# Altium PCB WorldClock.PcbDoc (part 8 of 13)
Units mil, origin at the board's own origin, x right, y up, seen from the top; angles counter-clockwise.
Board outline 3700 x 3850 mil, 2 copper layers (Top Layer, Bottom Layer); 227 components, 134 nets, 1324 pads, 248 vias.
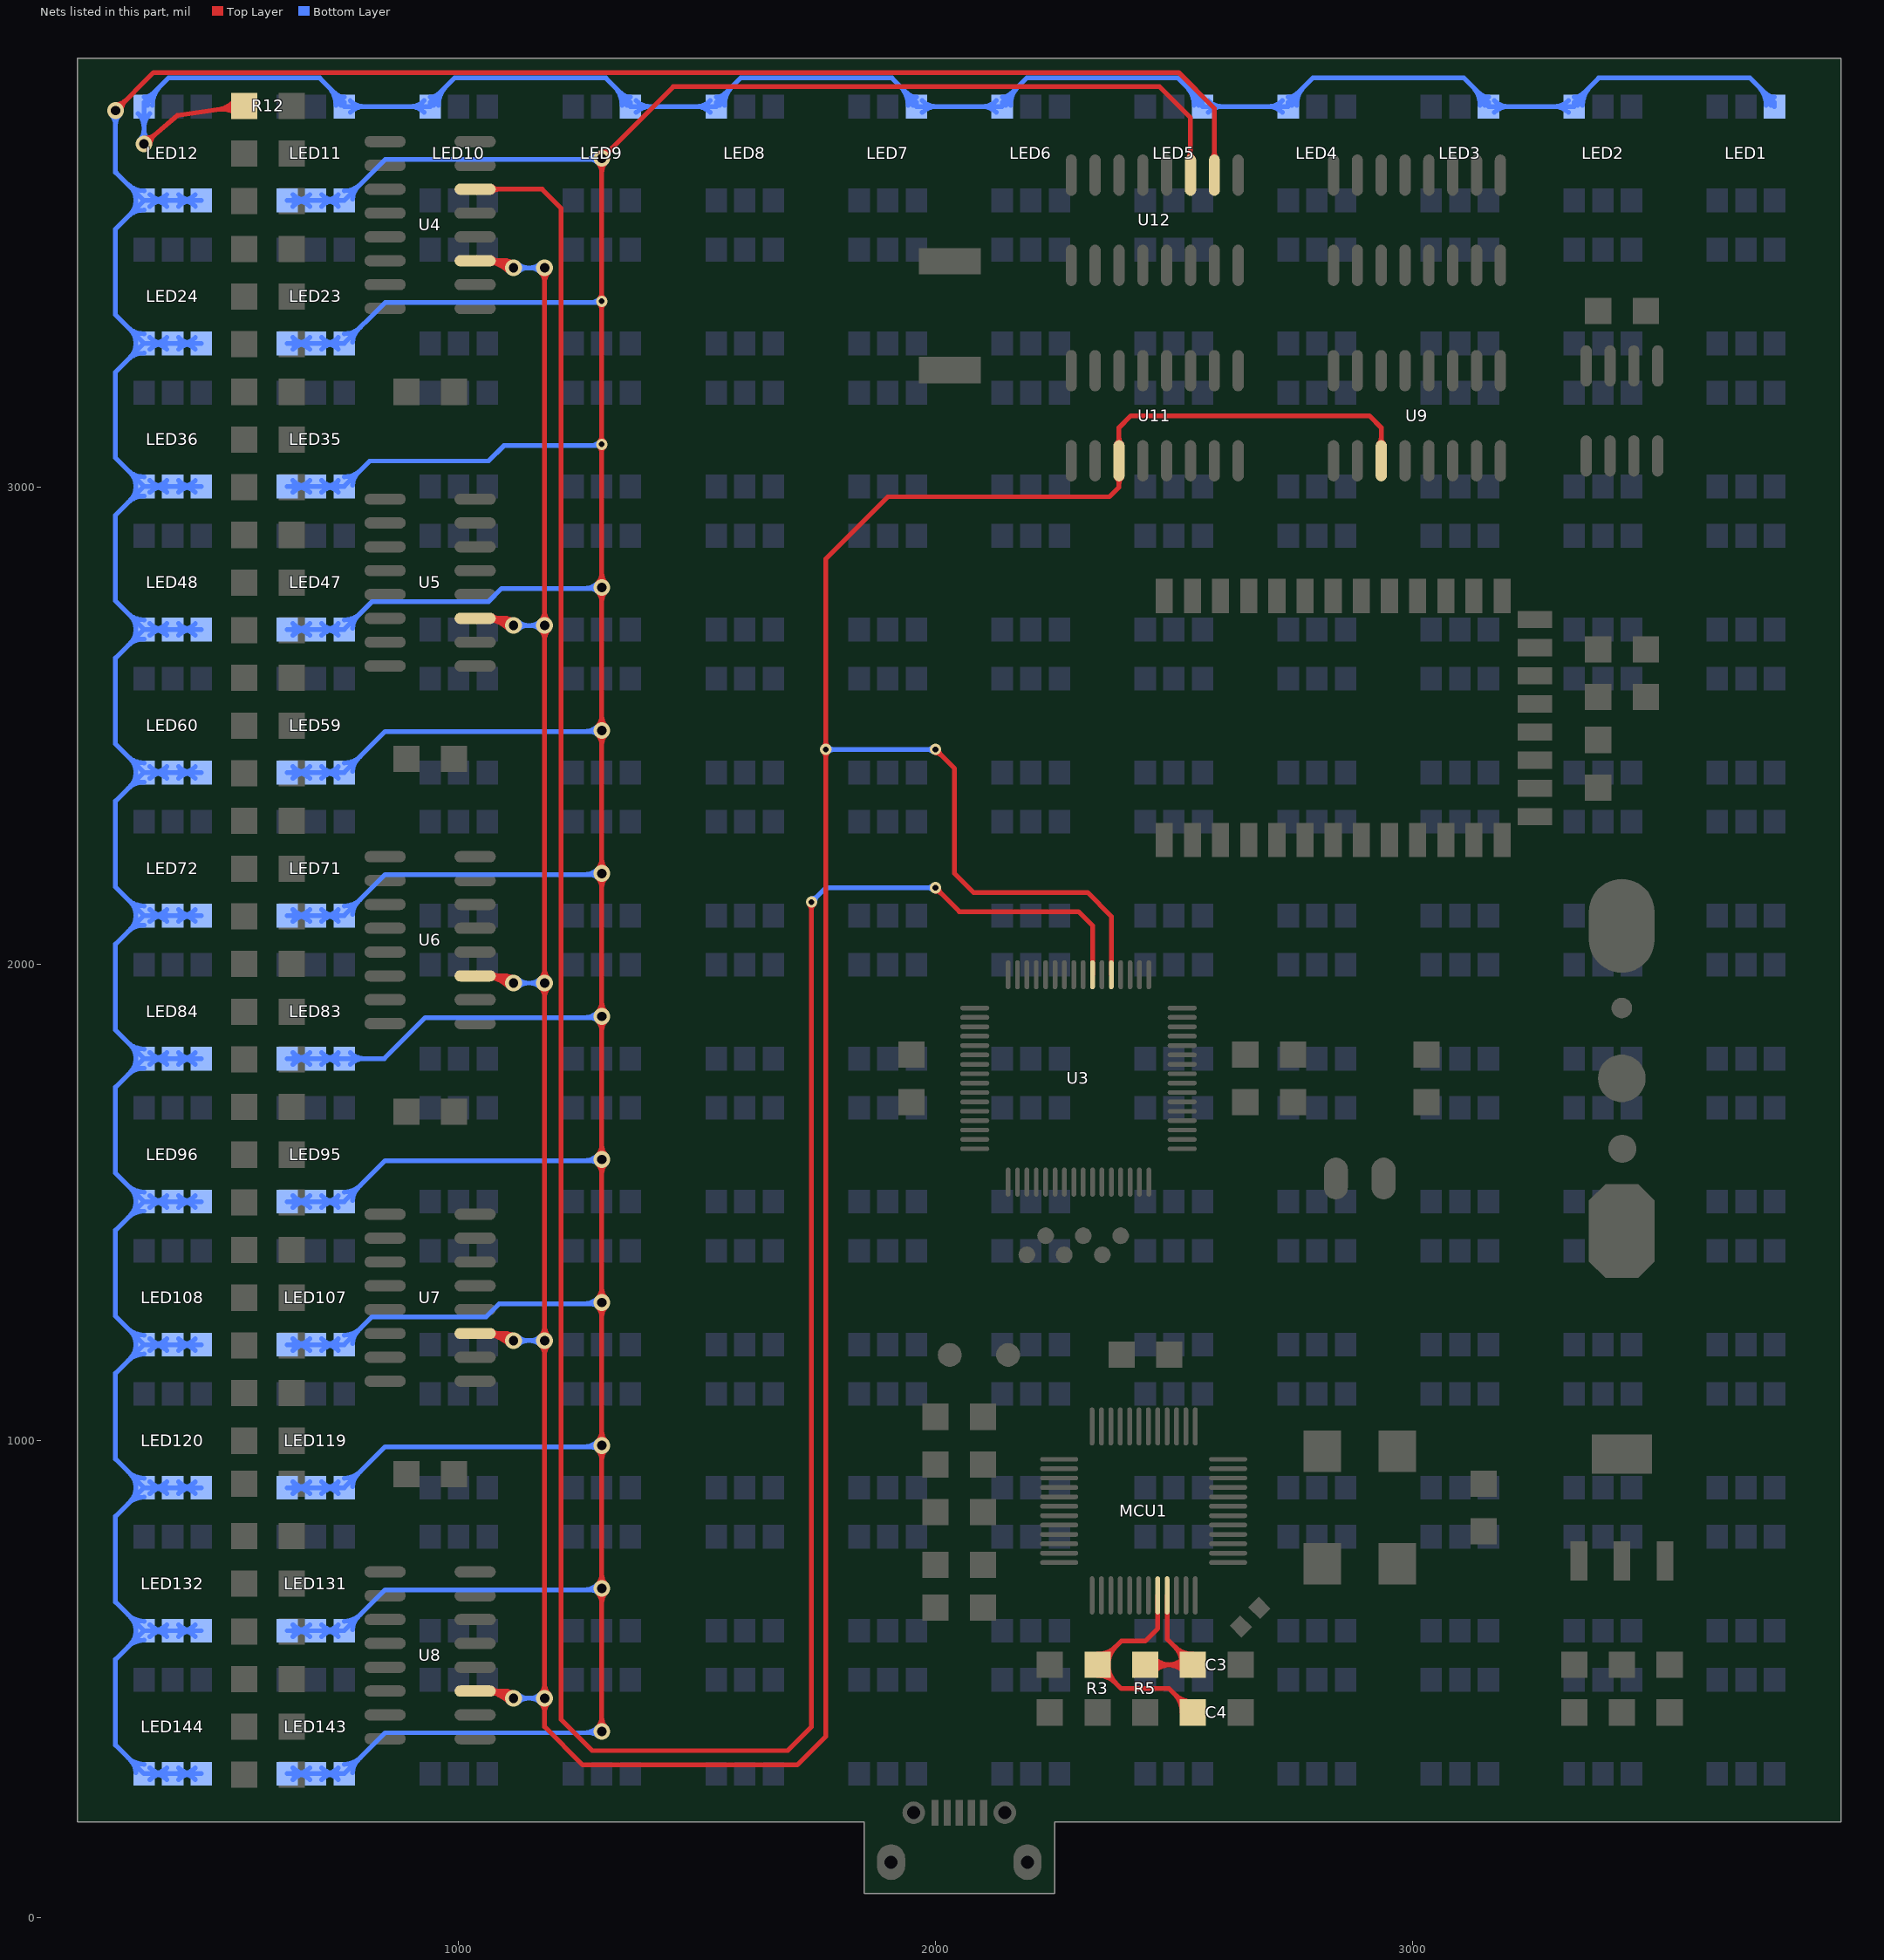
[diagram p8: the nets of this part, all layers, seen from the top]

## Via types
v1: diameter 35, hole 20, Top Layer to Bottom Layer, tented both sides, 213 vias
v2: diameter 24, hole 12, Top Layer to Bottom Layer, tented both sides, 35 vias

## Nets (pads, with @x,y where several pads share a name; then routed paths per layer and width w, separated by ;. In a path a pad name is that pad's centre, name@x,y a point inside that pad or via, vN(x,y) a via of type N, cw(c..) or ccw(c..) an arc to the next point about the centre after c; other vN are vias at no path point) (continued)
CH11: LED11.4 LED11.5 LED11.6 LED23.4 LED23.5 LED23.6 LED35.4 LED35.5 LED35.6 LED47.4 LED47.5 LED47.6 LED59.4 LED59.5 LED59.6 LED71.4 LED71.5 LED71.6 LED83.4 LED83.5 LED83.6 LED95.4 LED95.5 LED95.6 LED107.4 LED107.5 LED107.6 LED119.4 LED119.5 LED119.6 LED131.4 LED131.5 LED131.6 LED143.4 LED143.5 LED143.6 U12.11 | length 19957.2
  Top Layer w10: v1@1291.16,398.84 ccw(c1269.82,420.18) 1300,420.18 ccw(c1330.18,420.18) v1@1308.84,398.84 ; v1@1291.16,681.16 cw(c1269.82,659.82) 1300,659.82 cw(c1330.18,659.82) v1@1308.84,681.16 ; v1@1291.16,698.84 ccw(c1269.82,720.18) 1300,720.18 ccw(c1330.18,720.18) v1@1308.84,698.84 ; v1@1291.16,981.16 cw(c1269.82,959.82) 1300,959.82 cw(c1330.18,959.82) v1@1308.84,981.16 ; v1@1291.16,998.84 ccw(c1269.82,1020.18) 1300,1020.18 ccw(c1330.18,1020.18) v1@1308.84,998.84 ; v1@1291.16,1281.16 cw(c1269.82,1259.82) 1300,1259.82 cw(c1330.18,1259.82) v1@1308.84,1281.16 ; v1@1291.16,1298.84 ccw(c1269.82,1320.18) 1300,1320.18 ccw(c1330.18,1320.18) v1@1308.84,1298.84 ; v1@1291.16,1581.16 cw(c1269.82,1559.82) 1300,1559.82 cw(c1330.18,1559.82) v1@1308.84,1581.16 ; v1@1291.16,1598.84 ccw(c1269.82,1620.18) 1300,1620.18 ccw(c1330.18,1620.18) v1@1308.84,1598.84 ; v1@1291.16,1881.16 cw(c1269.82,1859.82) 1300,1859.82 cw(c1330.18,1859.82) v1@1308.84,1881.16 ; v1@1291.16,1898.84 ccw(c1269.82,1920.18) 1300,1920.18 ccw(c1330.18,1920.18) v1@1308.84,1898.84 ; v1@1291.16,2181.16 cw(c1269.82,2159.82) 1300,2159.82 cw(c1330.18,2159.82) v1@1308.84,2181.16 ; v1@1291.16,2198.84 ccw(c1269.82,2220.18) 1300,2220.18 ccw(c1330.18,2220.18) v1@1308.84,2198.84 ; v1@1291.16,2481.16 cw(c1269.82,2459.82) 1300,2459.82 cw(c1330.18,2459.82) v1@1308.84,2481.16 ; v1@1291.16,2498.84 ccw(c1269.82,2520.18) 1300,2520.18 ccw(c1330.18,2520.18) v1@1308.84,2498.84 ; v1@1291.16,2781.16 cw(c1269.82,2759.82) 1300,2759.82 cw(c1330.18,2759.82) v1@1308.84,2781.16 ; v1@1291.16,2798.84 ccw(c1269.82,2820.18) 1300,2820.18 ccw(c1330.18,2820.18) v1@1308.84,2798.84 ; v1@1291.16,3681.16 cw(c1269.82,3659.82) 1300,3659.82 cw(c1330.18,3659.82) v1@1308.84,3681.16 ; v2@1295.05,3085.05 cw(c1283.1,3073.1) 1300,3073.1 cw(c1316.9,3073.1) v2@1304.95,3085.05 ; v2@1295.05,3094.95 ccw(c1283.1,3106.9) 1300,3106.9 ccw(c1316.9,3106.9) v2@1304.95,3094.95 ; v2@1295.05,3385.05 cw(c1283.1,3373.1) 1300,3373.1 cw(c1316.9,3373.1) v2@1304.95,3385.05 ; v2@1295.05,3394.95 ccw(c1283.1,3406.9) 1300,3406.9 ccw(c1316.9,3406.9) v2@1304.95,3394.95 ; v1(1300,390) v1(1300,690) v1(1300,990) v1(1300,1290) v1(1300,1590) v1(1300,1890) v1(1300,2190) v1(1300,2490) v1(1300,2790) v2(1300,3090) v2(1300,3390) v1(1300,3690) 1450,3840 2470,3840 2535,3775 U12.11@2535,3654.49 ; v1@1300,3702.5 ccw(c1300,3732.68) 1321.34,3711.34 ccw(c1342.68,3690) v1@1312.5,3690 ; U12.11@2530.18,3690.8 ccw(c2518.56,3702.43) 2535,3702.43 ccw(c2551.44,3702.43) U12.11@2539.82,3690.8
  Bottom Layer w10: LED143.6@640,301.57 LED143.5@700,301.57 LED143.4@760,301.57 845.93,387.5 1297.5,387.5 v1(1300,390) ; LED131.6@640,601.57 LED131.5@700,601.57 LED131.4@760,601.57 845.93,687.5 1297.5,687.5 v1(1300,690) ; LED119.6@640,901.57 LED119.5@700,901.57 LED119.4@760,901.57 845.93,987.5 1297.5,987.5 v1(1300,990) ; LED107.6@640,1201.57 LED107.5@700,1201.57 LED107.4@760,1201.57 818.43,1260 1057.5,1260 1085,1287.5 1297.5,1287.5 v1(1300,1290) ; LED95.6@640,1501.57 LED95.5@700,1501.57 LED95.4@760,1501.57 845.93,1587.5 1297.5,1587.5 v1(1300,1590) ; LED83.6@640,1801.57 LED83.5@700,1801.57 LED83.4@760,1801.57 844.07,1801.57 930,1887.5 1297.5,1887.5 v1(1300,1890) ; LED71.6@640,2101.57 LED71.5@700,2101.57 LED71.4@760,2101.57 845.93,2187.5 1297.5,2187.5 v1(1300,2190) ; LED59.6@640,2401.57 LED59.5@700,2401.57 LED59.4@760,2401.57 845.93,2487.5 1297.5,2487.5 v1(1300,2490) ; LED47.6@640,2701.57 LED47.5@700,2701.57 LED47.4@760,2701.57 818.43,2760 1062.5,2760 1090,2787.5 1297.5,2787.5 v1(1300,2790) ; LED35.6@640,3001.57 LED35.5@700,3001.57 LED35.4@760,3001.57 813.43,3055 1062.5,3055 1095,3087.5 1297.5,3087.5 v2(1300,3090) ; LED23.6@640,3301.57 LED23.5@700,3301.57 LED23.4@760,3301.57 845.93,3387.5 1297.5,3387.5 v2(1300,3390) ; LED11.6@640,3601.57 LED11.5@700,3601.57 LED11.4@760,3601.57 845.93,3687.5 1297.5,3687.5 v1(1300,3690) ; LED143.6@652.37,289.2 cw(c682.25,259.33) 682.25,301.57 cw(c682.25,343.82) LED143.6@652.37,313.95 ; LED131.6@652.37,589.2 cw(c682.25,559.33) 682.25,601.57 cw(c682.25,643.82) LED131.6@652.37,613.95 ; LED119.6@652.37,889.2 cw(c682.25,859.33) 682.25,901.57 cw(c682.25,943.82) LED119.6@652.37,913.95 ; LED107.6@652.37,1189.2 cw(c682.25,1159.33) 682.25,1201.57 cw(c682.25,1243.82) LED107.6@652.37,1213.95 ; LED95.6@652.37,1489.2 cw(c682.25,1459.33) 682.25,1501.57 cw(c682.25,1543.82) LED95.6@652.37,1513.95 ; LED83.6@652.37,1789.2 cw(c682.25,1759.33) 682.25,1801.57 cw(c682.25,1843.82) LED83.6@652.37,1813.95 ; LED71.6@652.37,2089.2 cw(c682.25,2059.33) 682.25,2101.57 cw(c682.25,2143.82) LED71.6@652.37,2113.95 ; LED59.6@652.37,2389.2 cw(c682.25,2359.33) 682.25,2401.57 cw(c682.25,2443.82) LED59.6@652.37,2413.95 ; LED47.6@652.37,2689.2 cw(c682.25,2659.33) 682.25,2701.57 cw(c682.25,2743.82) LED47.6@652.37,2713.95 ; LED35.6@652.37,2989.2 cw(c682.25,2959.33) 682.25,3001.57 cw(c682.25,3043.82) LED35.6@652.37,3013.95 ; LED23.6@652.37,3289.2 cw(c682.25,3259.33) 682.25,3301.57 cw(c682.25,3343.82) LED23.6@652.37,3313.95 ; LED11.6@652.37,3589.2 cw(c682.25,3559.33) 682.25,3601.57 cw(c682.25,3643.82) LED11.6@652.37,3613.95 ; LED143.6@655.16,295.32 cw(c671.02,286.17) 666.28,303.86 ; LED143.6@655.16,307.82 ccw(c671.02,316.98) 666.28,299.29 ; LED131.6@655.16,595.32 cw(c671.02,586.17) 666.28,603.86 ; LED131.6@655.16,607.82 ccw(c671.02,616.98) 666.28,599.29 ; LED119.6@655.16,895.32 cw(c671.02,886.17) 666.28,903.86 ; LED119.6@655.16,907.82 ccw(c671.02,916.98) 666.28,899.29 ; LED107.6@655.16,1195.32 cw(c671.02,1186.17) 666.28,1203.86 ; LED107.6@655.16,1207.82 ccw(c671.02,1216.98) 666.28,1199.29 ; LED95.6@655.16,1495.32 cw(c671.02,1486.17) 666.28,1503.86 ; LED95.6@655.16,1507.82 ccw(c671.02,1516.98) 666.28,1499.29 ; LED83.6@655.16,1795.32 cw(c671.02,1786.17) 666.28,1803.86 ; LED83.6@655.16,1807.82 ccw(c671.02,1816.98) 666.28,1799.29 ; LED71.6@655.16,2095.32 cw(c671.02,2086.17) 666.28,2103.86 ; LED71.6@655.16,2107.82 ccw(c671.02,2116.98) 666.28,2099.29 ; LED59.6@655.16,2395.32 cw(c671.02,2386.17) 666.28,2403.86 ; LED59.6@655.16,2407.82 ccw(c671.02,2416.98) 666.28,2399.29 ; LED47.6@655.16,2695.32 cw(c671.02,2686.17) 666.28,2703.86 ; LED47.6@655.16,2707.82 ccw(c671.02,2716.98) 666.28,2699.29 ; LED35.6@655.16,2995.32 cw(c671.02,2986.17) 666.28,3003.86 ; LED35.6@655.16,3007.82 ccw(c671.02,3016.98) 666.28,2999.29 ; LED23.6@655.16,3295.32 cw(c671.02,3286.17) 666.28,3303.86 ; LED23.6@655.16,3307.82 ccw(c671.02,3316.98) 666.28,3299.29 ; LED11.6@655.16,3595.32 cw(c671.02,3586.17) 666.28,3603.86 ; LED11.6@655.16,3607.82 ccw(c671.02,3616.98) 666.28,3599.29 ; LED143.6@656.56,293.41 cw(c664.87,290.57) 667.15,299.06 ; LED143.6@656.56,309.74 ccw(c664.87,312.58) 667.15,304.09 ; LED131.6@656.56,593.41 cw(c664.87,590.57) 667.15,599.06 ; LED131.6@656.56,609.74 ccw(c664.87,612.58) 667.15,604.09 ; LED119.6@656.56,893.41 cw(c664.87,890.57) 667.15,899.06 ; LED119.6@656.56,909.74 ccw(c664.87,912.58) 667.15,904.09 ; LED107.6@656.56,1193.41 cw(c664.87,1190.57) 667.15,1199.06 ; LED107.6@656.56,1209.74 ccw(c664.87,1212.58) 667.15,1204.09 ; LED95.6@656.56,1493.41 cw(c664.87,1490.57) 667.15,1499.06 ; LED95.6@656.56,1509.74 ccw(c664.87,1512.58) 667.15,1504.09 ; LED83.6@656.56,1793.41 cw(c664.87,1790.57) 667.15,1799.06 ; LED83.6@656.56,1809.74 ccw(c664.87,1812.58) 667.15,1804.09 ; LED71.6@656.56,2093.41 cw(c664.87,2090.57) 667.15,2099.06 ; LED71.6@656.56,2109.74 ccw(c664.87,2112.58) 667.15,2104.09 ; LED59.6@656.56,2393.41 cw(c664.87,2390.57) 667.15,2399.06 ; LED59.6@656.56,2409.74 ccw(c664.87,2412.58) 667.15,2404.09 ; LED47.6@656.56,2693.41 cw(c664.87,2690.57) 667.15,2699.06 ; LED47.6@656.56,2709.74 ccw(c664.87,2712.58) 667.15,2704.09 ; LED35.6@656.56,2993.41 cw(c664.87,2990.57) 667.15,2999.06 ; LED35.6@656.56,3009.74 ccw(c664.87,3012.58) 667.15,3004.09 ; LED23.6@656.56,3293.41 cw(c664.87,3290.57) 667.15,3299.06 ; LED23.6@656.56,3309.74 ccw(c664.87,3312.58) 667.15,3304.09 ; LED11.6@656.56,3593.41 cw(c664.87,3590.57) 667.15,3599.06 ; LED11.6@656.56,3609.74 ccw(c664.87,3612.58) 667.15,3604.09 ; LED143.5@687.63,289.2 ccw(c657.75,259.33) 657.75,301.57 ccw(c657.75,343.82) LED143.5@687.63,313.95 ; LED131.5@687.63,589.2 ccw(c657.75,559.33) 657.75,601.57 ccw(c657.75,643.82) LED131.5@687.63,613.95 ; LED119.5@687.63,889.2 ccw(c657.75,859.33) 657.75,901.57 ccw(c657.75,943.82) LED119.5@687.63,913.95 ; LED107.5@687.63,1189.2 ccw(c657.75,1159.33) 657.75,1201.57 ccw(c657.75,1243.82) LED107.5@687.63,1213.95 ; LED95.5@687.63,1489.2 ccw(c657.75,1459.33) 657.75,1501.57 ccw(c657.75,1543.82) LED95.5@687.63,1513.95 ; LED83.5@687.63,1789.2 ccw(c657.75,1759.33) 657.75,1801.57 ccw(c657.75,1843.82) LED83.5@687.63,1813.95 ; LED71.5@687.63,2089.2 ccw(c657.75,2059.33) 657.75,2101.57 ccw(c657.75,2143.82) LED71.5@687.63,2113.95 ; LED59.5@687.63,2389.2 ccw(c657.75,2359.33) 657.75,2401.57 ccw(c657.75,2443.82) LED59.5@687.63,2413.95 ; LED47.5@687.63,2689.2 ccw(c657.75,2659.33) 657.75,2701.57 ccw(c657.75,2743.82) LED47.5@687.63,2713.95 ; LED35.5@687.63,2989.2 ccw(c657.75,2959.33) 657.75,3001.57 ccw(c657.75,3043.82) LED35.5@687.63,3013.95 ; LED23.5@687.63,3289.2 ccw(c657.75,3259.33) 657.75,3301.57 ccw(c657.75,3343.82) LED23.5@687.63,3313.95 ; LED11.5@687.63,3589.2 ccw(c657.75,3559.33) 657.75,3601.57 ccw(c657.75,3643.82) LED11.5@687.63,3613.95 ; LED143.5@712.37,289.2 cw(c742.25,259.33) 742.25,301.57 cw(c742.25,343.82) LED143.5@712.37,313.95 ; LED131.5@712.37,589.2 cw(c742.25,559.33) 742.25,601.57 cw(c742.25,643.82) LED131.5@712.37,613.95 ; LED119.5@712.37,889.2 cw(c742.25,859.33) 742.25,901.57 cw(c742.25,943.82) LED119.5@712.37,913.95 ; LED107.5@712.37,1189.2 cw(c742.25,1159.33) 742.25,1201.57 cw(c742.25,1243.82) LED107.5@712.37,1213.95 ; LED95.5@712.37,1489.2 cw(c742.25,1459.33) 742.25,1501.57 cw(c742.25,1543.82) LED95.5@712.37,1513.95 ; LED83.5@712.37,1789.2 cw(c742.25,1759.33) 742.25,1801.57 cw(c742.25,1843.82) LED83.5@712.37,1813.95 ; LED71.5@712.37,2089.2 cw(c742.25,2059.33) 742.25,2101.57 cw(c742.25,2143.82) LED71.5@712.37,2113.95 ; LED59.5@712.37,2389.2 cw(c742.25,2359.33) 742.25,2401.57 cw(c742.25,2443.82) LED59.5@712.37,2413.95 ; LED47.5@712.37,2689.2 cw(c742.25,2659.33) 742.25,2701.57 cw(c742.25,2743.82) LED47.5@712.37,2713.95 ; LED35.5@712.37,2989.2 cw(c742.25,2959.33) 742.25,3001.57 cw(c742.25,3043.82) LED35.5@712.37,3013.95 ; LED23.5@712.37,3289.2 cw(c742.25,3259.33) 742.25,3301.57 cw(c742.25,3343.82) LED23.5@712.37,3313.95 ; LED11.5@712.37,3589.2 cw(c742.25,3559.33) 742.25,3601.57 cw(c742.25,3643.82) LED11.5@712.37,3613.95 ; 732.85,299.06 cw(c735.13,290.57) LED143.4@743.44,293.41 ; 732.85,304.09 ccw(c735.13,312.58) LED143.4@743.44,309.74 ; 732.85,599.06 cw(c735.13,590.57) LED131.4@743.44,593.41 ; 732.85,604.09 ccw(c735.13,612.58) LED131.4@743.44,609.74 ; 732.85,899.06 cw(c735.13,890.57) LED119.4@743.44,893.41 ; 732.85,904.09 ccw(c735.13,912.58) LED119.4@743.44,909.74 ; 732.85,1199.06 cw(c735.13,1190.57) LED107.4@743.44,1193.41 ; 732.85,1204.09 ccw(c735.13,1212.58) LED107.4@743.44,1209.74 ; 732.85,1499.06 cw(c735.13,1490.57) LED95.4@743.44,1493.41 ; 732.85,1504.09 ccw(c735.13,1512.58) LED95.4@743.44,1509.74 ; 732.85,1799.06 cw(c735.13,1790.57) LED83.4@743.44,1793.41 ; 732.85,1804.09 ccw(c735.13,1812.58) LED83.4@743.44,1809.74 ; 732.85,2099.06 cw(c735.13,2090.57) LED71.4@743.44,2093.41 ; 732.85,2104.09 ccw(c735.13,2112.58) LED71.4@743.44,2109.74 ; 732.85,2399.06 cw(c735.13,2390.57) LED59.4@743.44,2393.41 ; 732.85,2404.09 ccw(c735.13,2412.58) LED59.4@743.44,2409.74 ; 732.85,2699.06 cw(c735.13,2690.57) LED47.4@743.44,2693.41 ; 732.85,2704.09 ccw(c735.13,2712.58) LED47.4@743.44,2709.74 ; 732.85,2999.06 cw(c735.13,2990.57) LED35.4@743.44,2993.41 ; 732.85,3004.09 ccw(c735.13,3012.58) LED35.4@743.44,3009.74 ; 732.85,3299.06 cw(c735.13,3290.57) LED23.4@743.44,3293.41 ; 732.85,3304.09 ccw(c735.13,3312.58) LED23.4@743.44,3309.74 ; 732.85,3599.06 cw(c735.13,3590.57) LED11.4@743.44,3593.41 ; 732.85,3604.09 ccw(c735.13,3612.58) LED11.4@743.44,3609.74 ; 733.72,299.29 ccw(c728.98,316.98) LED143.4@744.84,307.82 ; 733.72,303.86 cw(c728.98,286.17) LED143.4@744.84,295.32 ; 733.72,599.29 ccw(c728.98,616.98) LED131.4@744.84,607.82 ; 733.72,603.86 cw(c728.98,586.17) LED131.4@744.84,595.32 ; 733.72,899.29 ccw(c728.98,916.98) LED119.4@744.84,907.82 ; 733.72,903.86 cw(c728.98,886.17) LED119.4@744.84,895.32 ; 733.72,1199.29 ccw(c728.98,1216.98) LED107.4@744.84,1207.82 ; 733.72,1203.86 cw(c728.98,1186.17) LED107.4@744.84,1195.32 ; 733.72,1499.29 ccw(c728.98,1516.98) LED95.4@744.84,1507.82 ; 733.72,1503.86 cw(c728.98,1486.17) LED95.4@744.84,1495.32 ; 733.72,1799.29 ccw(c728.98,1816.98) LED83.4@744.84,1807.82 ; 733.72,1803.86 cw(c728.98,1786.17) LED83.4@744.84,1795.32 ; 733.72,2099.29 ccw(c728.98,2116.98) LED71.4@744.84,2107.82 ; 733.72,2103.86 cw(c728.98,2086.17) LED71.4@744.84,2095.32 ; 733.72,2399.29 ccw(c728.98,2416.98) LED59.4@744.84,2407.82 ; 733.72,2403.86 cw(c728.98,2386.17) LED59.4@744.84,2395.32 ; 733.72,2699.29 ccw(c728.98,2716.98) LED47.4@744.84,2707.82 ; 733.72,2703.86 cw(c728.98,2686.17) LED47.4@744.84,2695.32 ; 733.72,2999.29 ccw(c728.98,3016.98) LED35.4@744.84,3007.82 ; 733.72,3003.86 cw(c728.98,2986.17) LED35.4@744.84,2995.32 ; 733.72,3299.29 ccw(c728.98,3316.98) LED23.4@744.84,3307.82 ; 733.72,3303.86 cw(c728.98,3286.17) LED23.4@744.84,3295.32 ; 733.72,3599.29 ccw(c728.98,3616.98) LED11.4@744.84,3607.82 ; 733.72,3603.86 cw(c728.98,3586.17) LED11.4@744.84,3595.32 ; LED143.4@747.63,289.2 ccw(c717.75,259.33) 717.75,301.57 ccw(c717.75,343.82) LED143.4@747.63,313.95 ; LED131.4@747.63,589.2 ccw(c717.75,559.33) 717.75,601.57 ccw(c717.75,643.82) LED131.4@747.63,613.95 ; LED119.4@747.63,889.2 ccw(c717.75,859.33) 717.75,901.57 ccw(c717.75,943.82) LED119.4@747.63,913.95 ; LED107.4@747.63,1189.2 ccw(c717.75,1159.33) 717.75,1201.57 ccw(c717.75,1243.82) LED107.4@747.63,1213.95 ; LED95.4@747.63,1489.2 ccw(c717.75,1459.33) 717.75,1501.57 ccw(c717.75,1543.82) LED95.4@747.63,1513.95 ; LED83.4@747.63,1789.2 ccw(c717.75,1759.33) 717.75,1801.57 ccw(c717.75,1843.82) LED83.4@747.63,1813.95 ; LED71.4@747.63,2089.2 ccw(c717.75,2059.33) 717.75,2101.57 ccw(c717.75,2143.82) LED71.4@747.63,2113.95 ; LED59.4@747.63,2389.2 ccw(c717.75,2359.33) 717.75,2401.57 ccw(c717.75,2443.82) LED59.4@747.63,2413.95 ; LED47.4@747.63,2689.2 ccw(c717.75,2659.33) 717.75,2701.57 ccw(c717.75,2743.82) LED47.4@747.63,2713.95 ; LED35.4@747.63,2989.2 ccw(c717.75,2959.33) 717.75,3001.57 ccw(c717.75,3043.82) LED35.4@747.63,3013.95 ; LED23.4@747.63,3289.2 ccw(c717.75,3259.33) 717.75,3301.57 ccw(c717.75,3343.82) LED23.4@747.63,3313.95 ; LED11.4@747.63,3589.2 ccw(c717.75,3559.33) 717.75,3601.57 ccw(c717.75,3643.82) LED11.4@747.63,3613.95 ; LED143.4@760,321.57 ccw(c760,369.86) 794.14,335.72 ; LED131.4@760,621.57 ccw(c760,669.86) 794.14,635.72 ; LED119.4@760,921.57 ccw(c760,969.86) 794.14,935.72 ; LED107.4@760,1221.57 ccw(c760,1269.86) 794.14,1235.72 ; LED95.4@760,1521.57 ccw(c760,1569.86) 794.14,1535.72 ; LED71.4@760,2121.57 ccw(c760,2169.86) 794.14,2135.72 ; LED59.4@760,2421.57 ccw(c760,2469.86) 794.14,2435.72 ; LED47.4@760,2721.57 ccw(c760,2769.86) 794.14,2735.72 ; LED35.4@760,3021.57 ccw(c760,3069.86) 794.14,3035.72 ; LED23.4@760,3321.57 ccw(c760,3369.86) 794.14,3335.72 ; LED11.4@760,3621.57 ccw(c760,3669.86) 794.14,3635.72 ; LED83.4@772.37,1789.2 cw(c802.25,1759.33) 802.25,1801.57 cw(c802.25,1843.82) LED83.4@772.37,1813.95 ; LED143.4@777.5,304.07 cw(c813.71,304.07) 788.11,329.68 ; LED131.4@777.5,604.07 cw(c813.71,604.07) 788.11,629.68 ; LED119.4@777.5,904.07 cw(c813.71,904.07) 788.11,929.68 ; LED107.4@777.5,1204.07 cw(c813.71,1204.07) 788.11,1229.68 ; LED95.4@777.5,1504.07 cw(c813.71,1504.07) 788.11,1529.68 ; LED71.4@777.5,2104.07 cw(c813.71,2104.07) 788.11,2129.68 ; LED59.4@777.5,2404.07 cw(c813.71,2404.07) 788.11,2429.68 ; LED47.4@777.5,2704.07 cw(c813.71,2704.07) 788.11,2729.68 ; LED35.4@777.5,3004.07 cw(c813.71,3004.07) 788.11,3029.68 ; LED23.4@777.5,3304.07 cw(c813.71,3304.07) 788.11,3329.68 ; LED11.4@777.5,3604.07 cw(c813.71,3604.07) 788.11,3629.68 ; 1263.79,387.5 ccw(c1263.79,426.21) v1@1291.16,398.84 ; 1263.79,687.5 ccw(c1263.79,726.21) v1@1291.16,698.84 ; 1263.79,987.5 ccw(c1263.79,1026.21) v1@1291.16,998.84 ; 1263.79,1287.5 ccw(c1263.79,1326.21) v1@1291.16,1298.84 ; 1263.79,1587.5 ccw(c1263.79,1626.21) v1@1291.16,1598.84 ; 1263.79,1887.5 ccw(c1263.79,1926.21) v1@1291.16,1898.84 ; 1263.79,2187.5 ccw(c1263.79,2226.21) v1@1291.16,2198.84 ; 1263.79,2487.5 ccw(c1263.79,2526.21) v1@1291.16,2498.84 ; 1263.79,2787.5 ccw(c1263.79,2826.21) v1@1291.16,2798.84 ; 1263.79,3687.5 ccw(c1263.79,3726.21) v1@1291.16,3698.84 ; 1275.86,387.5 cw(c1275.86,365.86) v1@1291.16,381.16 ; 1275.86,687.5 cw(c1275.86,665.86) v1@1291.16,681.16 ; 1275.86,987.5 cw(c1275.86,965.86) v1@1291.16,981.16 ; 1275.86,1287.5 cw(c1275.86,1265.86) v1@1291.16,1281.16 ; 1275.86,1587.5 cw(c1275.86,1565.86) v1@1291.16,1581.16 ; 1275.86,1887.5 cw(c1275.86,1865.86) v1@1291.16,1881.16 ; 1275.86,2187.5 cw(c1275.86,2165.86) v1@1291.16,2181.16 ; 1275.86,2487.5 cw(c1275.86,2465.86) v1@1291.16,2481.16 ; 1275.86,2787.5 cw(c1275.86,2765.86) v1@1291.16,2781.16 ; 1275.86,3687.5 cw(c1275.86,3665.86) v1@1291.16,3681.16 ; 1277.06,3087.5 ccw(c1277.06,3112.93) v2@1295.05,3094.95 ; 1277.06,3387.5 ccw(c1277.06,3412.93) v2@1295.05,3394.95
CH12: LED12.4 LED12.5 LED12.6 LED24.4 LED24.5 LED24.6 LED36.4 LED36.5 LED36.6 LED48.4 LED48.5 LED48.6 LED60.4 LED60.5 LED60.6 LED72.4 LED72.5 LED72.6 LED84.4 LED84.5 LED84.6 LED96.4 LED96.5 LED96.6 LED108.4 LED108.5 LED108.6 LED120.4 LED120.5 LED120.6 LED132.4 LED132.5 LED132.6 LED144.4 LED144.5 LED144.6 U12.10 | length 14167.8
  Top Layer w10: v1(280,3790) 360,3870 2510,3870 2585,3795 U12.10@2585,3654.49 ; v1@280,3802.5 ccw(c280,3832.68) 301.34,3811.34 ccw(c322.68,3790) v1@292.5,3790 ; U12.10@2580.18,3690.8 ccw(c2568.56,3702.43) 2585,3702.43 ccw(c2601.44,3702.43) U12.10@2589.82,3690.8
  Bottom Layer w10: v1@271.16,3781.16 cw(c249.82,3759.82) 280,3759.82 cw(c310.18,3759.82) v1@288.84,3781.16 ; v1(280,3790) 280,3660 281.57,3660 LED12.6@340,3601.57 ; 305.86,335.72 ccw(c340,369.86) LED144.6@340,321.57 ; 305.86,567.43 cw(c340,533.29) LED132.6@340,581.57 ; 305.86,635.72 ccw(c340,669.86) LED132.6@340,621.57 ; 305.86,867.43 cw(c340,833.29) LED120.6@340,881.57 ; 305.86,935.72 ccw(c340,969.86) LED120.6@340,921.57 ; 305.86,1167.43 cw(c340,1133.29) LED108.6@340,1181.57 ; 305.86,1235.72 ccw(c340,1269.86) LED108.6@340,1221.57 ; 305.86,1467.43 cw(c340,1433.29) LED96.6@340,1481.57 ; 305.86,1535.72 ccw(c340,1569.86) LED96.6@340,1521.57 ; 305.86,1767.43 cw(c340,1733.29) LED84.6@340,1781.57 ; 305.86,1835.72 ccw(c340,1869.86) LED84.6@340,1821.57 ; 305.86,2067.43 cw(c340,2033.29) LED72.6@340,2081.57 ; 305.86,2135.72 ccw(c340,2169.86) LED72.6@340,2121.57 ; 305.86,2367.43 cw(c340,2333.29) LED60.6@340,2381.57 ; 305.86,2435.72 ccw(c340,2469.86) LED60.6@340,2421.57 ; 305.86,2667.43 cw(c340,2633.29) LED48.6@340,2681.57 ; 305.86,2735.72 ccw(c340,2769.86) LED48.6@340,2721.57 ; 305.86,2967.43 cw(c340,2933.29) LED36.6@340,2981.57 ; 305.86,3035.72 ccw(c340,3069.86) LED36.6@340,3021.57 ; 305.86,3267.43 cw(c340,3233.29) LED24.6@340,3281.57 ; 305.86,3335.72 ccw(c340,3369.86) LED24.6@340,3321.57 ; 305.86,3567.43 cw(c340,3533.29) LED12.6@340,3581.57 ; 305.86,3635.72 ccw(c340,3669.86) LED12.6@340,3621.57 ; 311.89,329.68 cw(c286.29,304.07) LED144.6@322.5,304.07 ; 311.89,573.47 ccw(c286.29,599.07) LED132.6@322.5,599.07 ; 311.89,629.68 cw(c286.29,604.07) LED132.6@322.5,604.07 ; 311.89,873.47 ccw(c286.29,899.07) LED120.6@322.5,899.07 ; 311.89,929.68 cw(c286.29,904.07) LED120.6@322.5,904.07 ; 311.89,1173.47 ccw(c286.29,1199.07) LED108.6@322.5,1199.07 ; 311.89,1229.68 cw(c286.29,1204.07) LED108.6@322.5,1204.07 ; 311.89,1473.47 ccw(c286.29,1499.07) LED96.6@322.5,1499.07 ; 311.89,1529.68 cw(c286.29,1504.07) LED96.6@322.5,1504.07 ; 311.89,1773.47 ccw(c286.29,1799.07) LED84.6@322.5,1799.07 ; 311.89,1829.68 cw(c286.29,1804.07) LED84.6@322.5,1804.07 ; 311.89,2073.47 ccw(c286.29,2099.07) LED72.6@322.5,2099.07 ; 311.89,2129.68 cw(c286.29,2104.07) LED72.6@322.5,2104.07 ; 311.89,2373.47 ccw(c286.29,2399.07) LED60.6@322.5,2399.07 ; 311.89,2429.68 cw(c286.29,2404.07) LED60.6@322.5,2404.07 ; 311.89,2673.47 ccw(c286.29,2699.07) LED48.6@322.5,2699.07 ; 311.89,2729.68 cw(c286.29,2704.07) LED48.6@322.5,2704.07 ; 311.89,2973.47 ccw(c286.29,2999.07) LED36.6@322.5,2999.07 ; 311.89,3029.68 cw(c286.29,3004.07) LED36.6@322.5,3004.07 ; 311.89,3273.47 ccw(c286.29,3299.07) LED24.6@322.5,3299.07 ; 311.89,3329.68 cw(c286.29,3304.07) LED24.6@322.5,3304.07 ; 311.89,3573.47 ccw(c286.29,3599.07) LED12.6@322.5,3599.07 ; 311.89,3629.68 cw(c286.29,3604.07) LED12.6@322.5,3604.07 ; LED144.6@352.37,289.2 cw(c382.25,259.33) 382.25,301.57 cw(c382.25,343.82) LED144.6@352.37,313.95 ; LED132.6@352.37,589.2 cw(c382.25,559.33) 382.25,601.57 cw(c382.25,643.82) LED132.6@352.37,613.95 ; LED120.6@352.37,889.2 cw(c382.25,859.33) 382.25,901.57 cw(c382.25,943.82) LED120.6@352.37,913.95 ; LED108.6@352.37,1189.2 cw(c382.25,1159.33) 382.25,1201.57 cw(c382.25,1243.82) LED108.6@352.37,1213.95 ; LED96.6@352.37,1489.2 cw(c382.25,1459.33) 382.25,1501.57 cw(c382.25,1543.82) LED96.6@352.37,1513.95 ; LED84.6@352.37,1789.2 cw(c382.25,1759.33) 382.25,1801.57 cw(c382.25,1843.82) LED84.6@352.37,1813.95 ; LED72.6@352.37,2089.2 cw(c382.25,2059.33) 382.25,2101.57 cw(c382.25,2143.82) LED72.6@352.37,2113.95 ; LED60.6@352.37,2389.2 cw(c382.25,2359.33) 382.25,2401.57 cw(c382.25,2443.82) LED60.6@352.37,2413.95 ; LED48.6@352.37,2689.2 cw(c382.25,2659.33) 382.25,2701.57 cw(c382.25,2743.82) LED48.6@352.37,2713.95 ; LED36.6@352.37,2989.2 cw(c382.25,2959.33) 382.25,3001.57 cw(c382.25,3043.82) LED36.6@352.37,3013.95 ; LED24.6@352.37,3289.2 cw(c382.25,3259.33) 382.25,3301.57 cw(c382.25,3343.82) LED24.6@352.37,3313.95 ; LED12.6@352.37,3589.2 cw(c382.25,3559.33) 382.25,3601.57 cw(c382.25,3643.82) LED12.6@352.37,3613.95 ; 372.85,299.06 cw(c375.13,290.57) LED144.5@383.44,293.41 ; 372.85,304.09 ccw(c375.13,312.58) LED144.5@383.44,309.74 ; 372.85,599.06 cw(c375.13,590.57) LED132.5@383.44,593.41 ; 372.85,604.09 ccw(c375.13,612.58) LED132.5@383.44,609.74 ; 372.85,899.06 cw(c375.13,890.57) LED120.5@383.44,893.41 ; 372.85,904.09 ccw(c375.13,912.58) LED120.5@383.44,909.74 ; 372.85,1199.06 cw(c375.13,1190.57) LED108.5@383.44,1193.41 ; 372.85,1204.09 ccw(c375.13,1212.58) LED108.5@383.44,1209.74 ; 372.85,1499.06 cw(c375.13,1490.57) LED96.5@383.44,1493.41 ; 372.85,1504.09 ccw(c375.13,1512.58) LED96.5@383.44,1509.74 ; 372.85,1799.06 cw(c375.13,1790.57) LED84.5@383.44,1793.41 ; 372.85,1804.09 ccw(c375.13,1812.58) LED84.5@383.44,1809.74 ; 372.85,2099.06 cw(c375.13,2090.57) LED72.5@383.44,2093.41 ; 372.85,2104.09 ccw(c375.13,2112.58) LED72.5@383.44,2109.74 ; 372.85,2399.06 cw(c375.13,2390.57) LED60.5@383.44,2393.41 ; 372.85,2404.09 ccw(c375.13,2412.58) LED60.5@383.44,2409.74 ; 372.85,2699.06 cw(c375.13,2690.57) LED48.5@383.44,2693.41 ; 372.85,2704.09 ccw(c375.13,2712.58) LED48.5@383.44,2709.74 ; 372.85,2999.06 cw(c375.13,2990.57) LED36.5@383.44,2993.41 ; 372.85,3004.09 ccw(c375.13,3012.58) LED36.5@383.44,3009.74 ; 372.85,3299.06 cw(c375.13,3290.57) LED24.5@383.44,3293.41 ; 372.85,3304.09 ccw(c375.13,3312.58) LED24.5@383.44,3309.74 ; 372.85,3599.06 cw(c375.13,3590.57) LED12.5@383.44,3593.41 ; 372.85,3604.09 ccw(c375.13,3612.58) LED12.5@383.44,3609.74 ; 373.72,299.29 ccw(c368.98,316.98) LED144.5@384.84,307.82 ; 373.72,303.86 cw(c368.98,286.17) LED144.5@384.84,295.32 ; 373.72,599.29 ccw(c368.98,616.98) LED132.5@384.84,607.82 ; 373.72,603.86 cw(c368.98,586.17) LED132.5@384.84,595.32 ; 373.72,899.29 ccw(c368.98,916.98) LED120.5@384.84,907.82 ; 373.72,903.86 cw(c368.98,886.17) LED120.5@384.84,895.32 ; 373.72,1199.29 ccw(c368.98,1216.98) LED108.5@384.84,1207.82 ; 373.72,1203.86 cw(c368.98,1186.17) LED108.5@384.84,1195.32 ; 373.72,1499.29 ccw(c368.98,1516.98) LED96.5@384.84,1507.82 ; 373.72,1503.86 cw(c368.98,1486.17) LED96.5@384.84,1495.32 ; 373.72,1799.29 ccw(c368.98,1816.98) LED84.5@384.84,1807.82 ; 373.72,1803.86 cw(c368.98,1786.17) LED84.5@384.84,1795.32 ; 373.72,2099.29 ccw(c368.98,2116.98) LED72.5@384.84,2107.82 ; 373.72,2103.86 cw(c368.98,2086.17) LED72.5@384.84,2095.32 ; 373.72,2399.29 ccw(c368.98,2416.98) LED60.5@384.84,2407.82 ; 373.72,2403.86 cw(c368.98,2386.17) LED60.5@384.84,2395.32 ; 373.72,2699.29 ccw(c368.98,2716.98) LED48.5@384.84,2707.82 ; 373.72,2703.86 cw(c368.98,2686.17) LED48.5@384.84,2695.32 ; 373.72,2999.29 ccw(c368.98,3016.98) LED36.5@384.84,3007.82 ; 373.72,3003.86 cw(c368.98,2986.17) LED36.5@384.84,2995.32 ; 373.72,3299.29 ccw(c368.98,3316.98) LED24.5@384.84,3307.82 ; 373.72,3303.86 cw(c368.98,3286.17) LED24.5@384.84,3295.32 ; 373.72,3599.29 ccw(c368.98,3616.98) LED12.5@384.84,3607.82 ; 373.72,3603.86 cw(c368.98,3586.17) LED12.5@384.84,3595.32 ; LED144.5@387.63,289.2 ccw(c357.75,259.33) 357.75,301.57 ccw(c357.75,343.82) LED144.5@387.63,313.95 ; LED132.5@387.63,589.2 ccw(c357.75,559.33) 357.75,601.57 ccw(c357.75,643.82) LED132.5@387.63,613.95 ; LED120.5@387.63,889.2 ccw(c357.75,859.33) 357.75,901.57 ccw(c357.75,943.82) LED120.5@387.63,913.95 ; LED108.5@387.63,1189.2 ccw(c357.75,1159.33) 357.75,1201.57 ccw(c357.75,1243.82) LED108.5@387.63,1213.95 ; LED96.5@387.63,1489.2 ccw(c357.75,1459.33) 357.75,1501.57 ccw(c357.75,1543.82) LED96.5@387.63,1513.95 ; LED84.5@387.63,1789.2 ccw(c357.75,1759.33) 357.75,1801.57 ccw(c357.75,1843.82) LED84.5@387.63,1813.95 ; LED72.5@387.63,2089.2 ccw(c357.75,2059.33) 357.75,2101.57 ccw(c357.75,2143.82) LED72.5@387.63,2113.95 ; LED60.5@387.63,2389.2 ccw(c357.75,2359.33) 357.75,2401.57 ccw(c357.75,2443.82) LED60.5@387.63,2413.95 ; LED48.5@387.63,2689.2 ccw(c357.75,2659.33) 357.75,2701.57 ccw(c357.75,2743.82) LED48.5@387.63,2713.95 ; LED36.5@387.63,2989.2 ccw(c357.75,2959.33) 357.75,3001.57 ccw(c357.75,3043.82) LED36.5@387.63,3013.95 ; LED24.5@387.63,3289.2 ccw(c357.75,3259.33) 357.75,3301.57 ccw(c357.75,3343.82) LED24.5@387.63,3313.95 ; LED12.5@387.63,3589.2 ccw(c357.75,3559.33) 357.75,3601.57 ccw(c357.75,3643.82) LED12.5@387.63,3613.95 ; LED144.5@412.37,289.2 cw(c442.25,259.33) 442.25,301.57 cw(c442.25,343.82) LED144.5@412.37,313.95 ; LED132.5@412.37,589.2 cw(c442.25,559.33) 442.25,601.57 cw(c442.25,643.82) LED132.5@412.37,613.95 ; LED120.5@412.37,889.2 cw(c442.25,859.33) 442.25,901.57 cw(c442.25,943.82) LED120.5@412.37,913.95 ; LED108.5@412.37,1189.2 cw(c442.25,1159.33) 442.25,1201.57 cw(c442.25,1243.82) LED108.5@412.37,1213.95 ; LED96.5@412.37,1489.2 cw(c442.25,1459.33) 442.25,1501.57 cw(c442.25,1543.82) LED96.5@412.37,1513.95 ; LED84.5@412.37,1789.2 cw(c442.25,1759.33) 442.25,1801.57 cw(c442.25,1843.82) LED84.5@412.37,1813.95 ; LED72.5@412.37,2089.2 cw(c442.25,2059.33) 442.25,2101.57 cw(c442.25,2143.82) LED72.5@412.37,2113.95 ; LED60.5@412.37,2389.2 cw(c442.25,2359.33) 442.25,2401.57 cw(c442.25,2443.82) LED60.5@412.37,2413.95 ; LED48.5@412.37,2689.2 cw(c442.25,2659.33) 442.25,2701.57 cw(c442.25,2743.82) LED48.5@412.37,2713.95 ; LED36.5@412.37,2989.2 cw(c442.25,2959.33) 442.25,3001.57 cw(c442.25,3043.82) LED36.5@412.37,3013.95 ; LED24.5@412.37,3289.2 cw(c442.25,3259.33) 442.25,3301.57 cw(c442.25,3343.82) LED24.5@412.37,3313.95 ; LED12.5@412.37,3589.2 cw(c442.25,3559.33) 442.25,3601.57 cw(c442.25,3643.82) LED12.5@412.37,3613.95 ; LED144.5@415.16,295.32 cw(c431.02,286.17) 426.28,303.86 ; LED144.5@415.16,307.82 ccw(c431.02,316.98) 426.28,299.29 ; LED132.5@415.16,595.32 cw(c431.02,586.17) 426.28,603.86 ; LED132.5@415.16,607.82 ccw(c431.02,616.98) 426.28,599.29 ; LED120.5@415.16,895.32 cw(c431.02,886.17) 426.28,903.86 ; LED120.5@415.16,907.82 ccw(c431.02,916.98) 426.28,899.29 ; LED108.5@415.16,1195.32 cw(c431.02,1186.17) 426.28,1203.86 ; LED108.5@415.16,1207.82 ccw(c431.02,1216.98) 426.28,1199.29 ; LED96.5@415.16,1495.32 cw(c431.02,1486.17) 426.28,1503.86 ; LED96.5@415.16,1507.82 ccw(c431.02,1516.98) 426.28,1499.29 ; LED84.5@415.16,1795.32 cw(c431.02,1786.17) 426.28,1803.86 ; LED84.5@415.16,1807.82 ccw(c431.02,1816.98) 426.28,1799.29 ; LED72.5@415.16,2095.32 cw(c431.02,2086.17) 426.28,2103.86 ; LED72.5@415.16,2107.82 ccw(c431.02,2116.98) 426.28,2099.29 ; LED60.5@415.16,2395.32 cw(c431.02,2386.17) 426.28,2403.86 ; LED60.5@415.16,2407.82 ccw(c431.02,2416.98) 426.28,2399.29 ; LED48.5@415.16,2695.32 cw(c431.02,2686.17) 426.28,2703.86 ; LED48.5@415.16,2707.82 ccw(c431.02,2716.98) 426.28,2699.29 ; LED36.5@415.16,2995.32 cw(c431.02,2986.17) 426.28,3003.86 ; LED36.5@415.16,3007.82 ccw(c431.02,3016.98) 426.28,2999.29 ; LED24.5@415.16,3295.32 cw(c431.02,3286.17) 426.28,3303.86 ; LED24.5@415.16,3307.82 ccw(c431.02,3316.98) 426.28,3299.29 ; LED12.5@415.16,3595.32 cw(c431.02,3586.17) 426.28,3603.86 ; LED12.5@415.16,3607.82 ccw(c431.02,3616.98) 426.28,3599.29 ; LED144.5@416.56,293.41 cw(c424.87,290.57) 427.15,299.06 ; LED144.5@416.56,309.74 ccw(c424.87,312.58) 427.15,304.09 ; LED132.5@416.56,593.41 cw(c424.87,590.57) 427.15,599.06 ; LED132.5@416.56,609.74 ccw(c424.87,612.58) 427.15,604.09 ; LED120.5@416.56,893.41 cw(c424.87,890.57) 427.15,899.06 ; LED120.5@416.56,909.74 ccw(c424.87,912.58) 427.15,904.09 ; LED108.5@416.56,1193.41 cw(c424.87,1190.57) 427.15,1199.06 ; LED108.5@416.56,1209.74 ccw(c424.87,1212.58) 427.15,1204.09 ; LED96.5@416.56,1493.41 cw(c424.87,1490.57) 427.15,1499.06 ; LED96.5@416.56,1509.74 ccw(c424.87,1512.58) 427.15,1504.09 ; LED84.5@416.56,1793.41 cw(c424.87,1790.57) 427.15,1799.06 ; LED84.5@416.56,1809.74 ccw(c424.87,1812.58) 427.15,1804.09 ; LED72.5@416.56,2093.41 cw(c424.87,2090.57) 427.15,2099.06 ; LED72.5@416.56,2109.74 ccw(c424.87,2112.58) 427.15,2104.09 ; LED60.5@416.56,2393.41 cw(c424.87,2390.57) 427.15,2399.06 ; LED60.5@416.56,2409.74 ccw(c424.87,2412.58) 427.15,2404.09 ; LED48.5@416.56,2693.41 cw(c424.87,2690.57) 427.15,2699.06 ; LED48.5@416.56,2709.74 ccw(c424.87,2712.58) 427.15,2704.09 ; LED36.5@416.56,2993.41 cw(c424.87,2990.57) 427.15,2999.06 ; LED36.5@416.56,3009.74 ccw(c424.87,3012.58) 427.15,3004.09 ; LED24.5@416.56,3293.41 cw(c424.87,3290.57) 427.15,3299.06 ; LED24.5@416.56,3309.74 ccw(c424.87,3312.58) 427.15,3304.09 ; LED12.5@416.56,3593.41 cw(c424.87,3590.57) 427.15,3599.06 ; LED12.5@416.56,3609.74 ccw(c424.87,3612.58) 427.15,3604.09 ; LED144.4@447.63,289.2 ccw(c417.75,259.33) 417.75,301.57 ccw(c417.75,343.82) LED144.4@447.63,313.95 ; LED132.4@447.63,589.2 ccw(c417.75,559.33) 417.75,601.57 ccw(c417.75,643.82) LED132.4@447.63,613.95 ; LED120.4@447.63,889.2 ccw(c417.75,859.33) 417.75,901.57 ccw(c417.75,943.82) LED120.4@447.63,913.95 ; LED108.4@447.63,1189.2 ccw(c417.75,1159.33) 417.75,1201.57 ccw(c417.75,1243.82) LED108.4@447.63,1213.95 ; LED96.4@447.63,1489.2 ccw(c417.75,1459.33) 417.75,1501.57 ccw(c417.75,1543.82) LED96.4@447.63,1513.95 ; LED84.4@447.63,1789.2 ccw(c417.75,1759.33) 417.75,1801.57 ccw(c417.75,1843.82) LED84.4@447.63,1813.95 ; LED72.4@447.63,2089.2 ccw(c417.75,2059.33) 417.75,2101.57 ccw(c417.75,2143.82) LED72.4@447.63,2113.95 ; LED60.4@447.63,2389.2 ccw(c417.75,2359.33) 417.75,2401.57 ccw(c417.75,2443.82) LED60.4@447.63,2413.95 ; LED48.4@447.63,2689.2 ccw(c417.75,2659.33) 417.75,2701.57 ccw(c417.75,2743.82) LED48.4@447.63,2713.95 ; LED36.4@447.63,2989.2 ccw(c417.75,2959.33) 417.75,3001.57 ccw(c417.75,3043.82) LED36.4@447.63,3013.95 ; LED24.4@447.63,3289.2 ccw(c417.75,3259.33) 417.75,3301.57 ccw(c417.75,3343.82) LED24.4@447.63,3313.95 ; LED12.4@447.63,3589.2 ccw(c417.75,3559.33) 417.75,3601.57 ccw(c417.75,3643.82) LED12.4@447.63,3613.95 ; LED144.4@460,301.57 LED144.5@400,301.57 LED144.6@340,301.57 280,361.57 280,541.57 LED132.6@340,601.57 ; LED132.4@460,601.57 LED132.5@400,601.57 LED132.6@340,601.57 ; LED120.4@460,901.57 LED120.5@400,901.57 LED120.6@340,901.57 ; LED108.4@460,1201.57 LED108.5@400,1201.57 LED108.6@340,1201.57 ; LED96.4@460,1501.57 LED96.5@400,1501.57 LED96.6@340,1501.57 ; LED84.4@460,1801.57 LED84.5@400,1801.57 LED84.6@340,1801.57 ; LED72.4@460,2101.57 LED72.5@400,2101.57 LED72.6@340,2101.57 ; LED60.4@460,2401.57 LED60.5@400,2401.57 LED60.6@340,2401.57 ; LED48.4@460,2701.57 LED48.5@400,2701.57 LED48.6@340,2701.57 ; LED36.4@460,3001.57 LED36.5@400,3001.57 LED36.6@340,3001.57 ; LED24.4@460,3301.57 LED24.5@400,3301.57 LED24.6@340,3301.57 ; LED12.4@460,3601.57 LED12.5@400,3601.57 LED12.6@340,3601.57 ; LED132.6@340,601.57 280,661.57 280,841.57 LED120.6@340,901.57 ; LED120.6@340,901.57 280,961.57 280,1141.57 LED108.6@340,1201.57 ; LED108.6@340,1201.57 280,1261.57 280,1441.57 LED96.6@340,1501.57 ; LED96.6@340,1501.57 280,1561.57 280,1741.57 LED84.6@340,1801.57 ; LED84.6@340,1801.57 280,1861.57 280,2041.57 LED72.6@340,2101.57 ; LED72.6@340,2101.57 280,2161.57 280,2341.57 LED60.6@340,2401.57 ; LED60.6@340,2401.57 280,2461.57 280,2641.57 LED48.6@340,2701.57 ; LED48.6@340,2701.57 280,2761.57 280,2941.57 LED36.6@340,3001.57 ; LED36.6@340,3001.57 280,3061.57 280,3241.57 LED24.6@340,3301.57 ; LED24.6@340,3301.57 280,3361.57 280,3541.57 LED12.6@340,3601.57
D+: C3.2 MCU1.33 R5.2 | length 666.2
  Top Layer w10: R5.2@2440,530 C3.2@2540,530 2485.94,584.06 MCU1.33@2485.94,675.67 ; R5.2@2448.84,521.16 cw(c2470.18,499.82) 2470.18,530 cw(c2470.18,560.18) R5.2@2448.84,538.84 ; R5.2@2455.91,514.09 cw(c2494.32,475.68) 2494.32,530 cw(c2494.32,584.32) R5.2@2455.91,545.91 ; C3.2@2517.5,530 ccw(c2463.18,530) 2501.59,568.41 ccw(c2540,606.82) C3.2@2540,552.5 ; C3.2@2524.09,514.09 ccw(c2485.68,475.68) 2485.68,530 ccw(c2485.68,584.32) C3.2@2524.09,545.91 ; C3.2@2527.5,530 ccw(c2497.32,530) 2518.66,551.34 ccw(c2540,572.68) C3.2@2540,542.5 ; C3.2@2531.16,521.16 ccw(c2509.82,499.82) 2509.82,530 ccw(c2509.82,560.18) C3.2@2531.16,538.84
D-: C4.2 MCU1.32 R3.2 | length 866.9
  Top Layer w10: R3.2@2340,507.5 cw(c2340,453.18) 2378.41,491.59 cw(c2416.82,530) 2362.5,530 cw(c2416.82,530) 2378.41,568.41 cw(c2340,606.82) R3.2@2340,552.5 ; R3.2@2340,517.5 cw(c2340,487.32) 2361.34,508.66 cw(c2382.68,530) 2352.5,530 cw(c2382.68,530) 2361.34,551.34 cw(c2340,572.68) R3.2@2340,542.5 ; MCU1.32@2466.26,675.67 2466.26,606.26 2440,580 2390,580 R3.2@2340,530 2390,480 2490,480 C4.2@2540,430 ; C4.2@2517.5,430 ccw(c2463.18,430) 2501.59,468.41 ccw(c2540,506.82) C4.2@2540,452.5 ; C4.2@2527.5,430 ccw(c2497.32,430) 2518.66,451.34 ccw(c2540,472.68) C4.2@2540,442.5
DCK: U3.21 U4.11 U5.11 U6.11 U7.11 U8.11 U9.11 U11.11 | length 11413.8
  Top Layer w10: U8.11@1034.49,475 1100,475 ; U7.11@1034.49,1225 1100,1225 ; U6.11@1034.49,1975 1100,1975 ; U5.11@1034.49,2725 1100,2725 ; U4.11@1034.49,3475 1100,3475 ; U8.11@1048.61,475 cw(c1048.61,393.61) v1@1106.16,451.16 ; U7.11@1048.61,1225 cw(c1048.61,1143.61) v1@1106.16,1201.16 ; U6.11@1048.61,1975 cw(c1048.61,1893.61) v1@1106.16,1951.16 ; U5.11@1048.61,2725 cw(c1048.61,2643.61) v1@1106.16,2701.16 ; U4.11@1048.61,3475 cw(c1048.61,3393.61) v1@1106.16,3451.16 ; U8.11@1070.8,470.18 cw(c1082.43,458.56) 1082.43,475 cw(c1082.43,491.44) U8.11@1070.8,479.82 ; U7.11@1070.8,1220.18 cw(c1082.43,1208.56) 1082.43,1225 cw(c1082.43,1241.44) U7.11@1070.8,1229.82 ; U6.11@1070.8,1970.18 cw(c1082.43,1958.56) 1082.43,1975 cw(c1082.43,1991.44) U6.11@1070.8,1979.82 ; U5.11@1070.8,2720.18 cw(c1082.43,2708.56) 1082.43,2725 cw(c1082.43,2741.44) U5.11@1070.8,2729.82 ; U4.11@1070.8,3470.18 cw(c1082.43,3458.56) 1082.43,3475 cw(c1082.43,3491.44) U4.11@1070.8,3479.82 ; U8.11@1072.75,475 cw(c1072.75,417.75) v1@1113.23,458.23 ; U7.11@1072.75,1225 cw(c1072.75,1167.75) v1@1113.23,1208.23 ; U6.11@1072.75,1975 cw(c1072.75,1917.75) v1@1113.23,1958.23 ; U5.11@1072.75,2725 cw(c1072.75,2667.75) v1@1113.23,2708.23 ; U4.11@1072.75,3475 cw(c1072.75,3417.75) v1@1113.23,3458.23 ; 1096.89,475 cw(c1096.89,441.89) v1@1120.3,465.3 ; 1096.89,1225 cw(c1096.89,1191.89) v1@1120.3,1215.3 ; 1096.89,1975 cw(c1096.89,1941.89) v1@1120.3,1965.3 ; 1096.89,2725 cw(c1096.89,2691.89) v1@1120.3,2715.3 ; 1096.89,3475 cw(c1096.89,3441.89) v1@1120.3,3465.3 ; v1@1102.99,463.45 ccw(c1091.69,466.69) 1100,475 ; v1@1102.99,1213.45 ccw(c1091.69,1216.69) 1100,1225 ; v1@1102.99,1963.45 ccw(c1091.69,1966.69) 1100,1975 ; v1@1102.99,2713.45 ccw(c1091.69,2716.69) 1100,2725 ; v1@1102.99,3463.45 ccw(c1091.69,3466.69) 1100,3475 ; v1@1111.55,472.01 cw(c1108.31,483.31) 1100,475 ; v1@1111.55,1222.01 cw(c1108.31,1233.31) 1100,1225 ; v1@1111.55,1972.01 cw(c1108.31,1983.31) 1100,1975 ; v1@1111.55,2722.01 cw(c1108.31,2733.31) 1100,2725 ; v1@1111.55,3472.01 cw(c1108.31,3483.31) 1100,3475 ; v1(1115,460) 1100,475 ; v1(1115,1210) 1100,1225 ; v1(1115,1960) 1100,1975 ; v1(1115,2710) 1100,2725 ; v1(1115,3460) 1100,3475 ; v1@1171.16,451.16 cw(c1149.82,429.82) 1180,429.82 cw(c1210.18,429.82) v1@1188.84,451.16 ; v1@1171.16,468.84 ccw(c1149.82,490.18) 1180,490.18 ccw(c1210.18,490.18) v1@1188.84,468.84 ; v1@1171.16,1201.16 cw(c1149.82,1179.82) 1180,1179.82 cw(c1210.18,1179.82) v1@1188.84,1201.16 ; v1@1171.16,1218.84 ccw(c1149.82,1240.18) 1180,1240.18 ccw(c1210.18,1240.18) v1@1188.84,1218.84 ; v1@1171.16,1951.16 cw(c1149.82,1929.82) 1180,1929.82 cw(c1210.18,1929.82) v1@1188.84,1951.16 ; v1@1171.16,1968.84 ccw(c1149.82,1990.18) 1180,1990.18 ccw(c1210.18,1990.18) v1@1188.84,1968.84 ; v1@1171.16,2701.16 cw(c1149.82,2679.82) 1180,2679.82 cw(c1210.18,2679.82) v1@1188.84,2701.16 ; v1@1171.16,2718.84 ccw(c1149.82,2740.18) 1180,2740.18 ccw(c1210.18,2740.18) v1@1188.84,2718.84 ; v1@1171.16,3451.16 cw(c1149.82,3429.82) 1180,3429.82 cw(c1210.18,3429.82) v1@1188.84,3451.16 ; v1(1180,3460) v1(1180,1960) v1(1180,1210) v1(1180,460) 1180,400 1260,320 1710,320 1770,380 v2(1770,2450) 1770,2850 1900,2980 2365,2980 2385,3000 2385,3125 2410,3150 2910,3150 2935,3125 U9.11@2935,3055.51 ; v2@1765.05,2445.05 cw(c1753.1,2433.1) 1770,2433.1 cw(c1786.9,2433.1) v2@1774.95,2445.05 ; v2@1765.05,2454.95 ccw(c1753.1,2466.9) 1770,2466.9 ccw(c1786.9,2466.9) v2@1774.95,2454.95 ; v2@2000,2443 cw(c2000,2426.1) 2011.95,2438.05 cw(c2023.9,2450) v2@2007,2450 ; v2(2000,2450) 2040,2410 2040,2190 2080,2150 2318.9,2150 2368.9,2100 U3.21@2368.9,1977.52 ; U11.11@2380.18,3019.2 cw(c2368.56,3007.57) 2385,3007.57 cw(c2401.44,3007.57) U11.11@2389.82,3019.2 ; U11.11@2380.18,3091.82 ccw(c2368.56,3103.45) 2385,3103.45 ccw(c2401.44,3103.45) U11.11@2389.82,3091.82 ; U9.11@2930.18,3091.82 ccw(c2918.56,3103.45) 2935,3103.45 ccw(c2951.44,3103.45) U9.11@2939.82,3091.82
  Bottom Layer w10: v1(1115,460) v1(1180,460) ; v1(1115,1210) v1(1180,1210) ; v1(1115,1960) v1(1180,1960) ; v1(1115,2710) v1(1180,2710) ; v1(1115,3460) v1(1180,3460) ; v1@1123.84,451.16 cw(c1145.18,429.82) 1145.18,460 cw(c1145.18,490.18) v1@1123.84,468.84 ; v1@1123.84,1201.16 cw(c1145.18,1179.82) 1145.18,1210 cw(c1145.18,1240.18) v1@1123.84,1218.84 ; v1@1123.84,1951.16 cw(c1145.18,1929.82) 1145.18,1960 cw(c1145.18,1990.18) v1@1123.84,1968.84 ; v1@1123.84,2701.16 cw(c1145.18,2679.82) 1145.18,2710 cw(c1145.18,2740.18) v1@1123.84,2718.84 ; v1@1123.84,3451.16 cw(c1145.18,3429.82) 1145.18,3460 cw(c1145.18,3490.18) v1@1123.84,3468.84 ; v1@1171.16,451.16 ccw(c1149.82,429.82) 1149.82,460 ccw(c1149.82,490.18) v1@1171.16,468.84 ; v1@1171.16,1201.16 ccw(c1149.82,1179.82) 1149.82,1210 ccw(c1149.82,1240.18) v1@1171.16,1218.84 ; v1@1171.16,1951.16 ccw(c1149.82,1929.82) 1149.82,1960 ccw(c1149.82,1990.18) v1@1171.16,1968.84 ; v1@1171.16,2701.16 ccw(c1149.82,2679.82) 1149.82,2710 ccw(c1149.82,2740.18) v1@1171.16,2718.84 ; v1@1171.16,3451.16 ccw(c1149.82,3429.82) 1149.82,3460 ccw(c1149.82,3490.18) v1@1171.16,3468.84 ; v2(1770,2450) v2(2000,2450) ; v2@1774.95,2445.05 cw(c1786.9,2433.1) 1786.9,2450 cw(c1786.9,2466.9) v2@1774.95,2454.95 ; v2@1995.05,2445.05 ccw(c1983.1,2433.1) 1983.1,2450 ccw(c1983.1,2466.9) v2@1995.05,2454.95
DIN: U3.23 U4.14 | length 6539.6
  Top Layer w10: U4.14@1034.49,3625 1175,3625 1215,3585 1215,415 1280,350 1690,350 1740,400 v2(1740,2130) ; U4.14@1070.8,3620.18 cw(c1082.43,3608.56) 1082.43,3625 cw(c1082.43,3641.44) U4.14@1070.8,3629.82 ; v2@1735.05,2125.05 cw(c1723.1,2113.1) 1740,2113.1 cw(c1756.9,2113.1) v2@1744.95,2125.05 ; v2@2000,2153 cw(c2000,2136.1) 2011.95,2148.05 cw(c2023.9,2160) v2@2007,2160 ; v2(2000,2160) 2050,2110 2300,2110 2329.53,2080.47 U3.23@2329.53,1977.52
  Bottom Layer w10: v2(1740,2130) 1770,2160 v2(2000,2160) ; v2@1740,2137 ccw(c1740,2153.9) 1751.95,2141.95 ccw(c1763.9,2130) v2@1747,2130 ; v2@1995.05,2155.05 ccw(c1983.1,2143.1) 1983.1,2160 ccw(c1983.1,2176.9) v2@1995.05,2164.95
G1: LED1.3 LED2.1 LED3.3 LED4.1 LED5.3 LED6.1 LED7.3 LED8.1 LED9.3 LED10.1 LED11.3 LED12.1 R12.2 | length 6157.5
  Top Layer w10: v1(340,3720) 410,3780 R12.2@550,3800 ; v1@340.96,3732.46 ccw(c343.27,3762.55) 362.91,3739.64 ccw(c382.55,3716.73) v1@352.46,3719.04 ; R12.2@532,3813.5 cw(c488.54,3846.09) 496.23,3792.32 cw(c503.91,3738.54) R12.2@536.5,3782 ; R12.2@540,3807.5 cw(c515.86,3825.61) 520.13,3795.73 cw(c524.39,3765.86) R12.2@542.5,3790
  Bottom Layer w10: LED12.1@327.63,3783.55 cw(c297.75,3753.68) 340,3753.68 cw(c382.25,3753.68) LED12.1@352.37,3783.55 ; v1@331.16,3728.84 ccw(c309.82,3750.18) 340,3750.18 ccw(c370.18,3750.18) v1@348.84,3728.84 ; v1(340,3720) LED12.1@340,3798.43 340,3807.14 391.29,3858.43 708.71,3858.43 760,3807.14 LED11.3@760,3798.43 LED10.1@940,3798.43 940,3807.14 991.29,3858.43 1308.71,3858.43 1360,3807.14 LED9.3@1360,3798.43 LED8.1@1540,3798.43 1540,3807.14 1591.29,3858.43 1908.71,3858.43 1960,3807.14 LED7.3@1960,3798.43 LED6.1@2140,3798.43 2140,3807.14 2191.29,3858.43 2508.71,3858.43 2560,3807.14 LED5.3@2560,3798.43 LED4.1@2740,3798.43 2740,3807.14 2791.29,3858.43 3108.71,3858.43 3160,3807.14 LED3.3@3160,3798.43 LED2.1@3340,3798.43 3340,3807.14 3391.29,3858.43 3708.71,3858.43 3760,3807.14 LED1.3@3760,3798.43 ; LED12.1@340,3818.43 ccw(c340,3845.67) 359.27,3826.41 ; LED12.1@347.5,3800.93 cw(c380.61,3800.93) 357.2,3824.34 ; LED12.1@357.5,3800.93 cw(c414.75,3800.93) 374.27,3841.41 ; 725.73,3841.41 cw(c685.25,3800.93) LED11.3@742.5,3800.93 ; 740.73,3826.41 ccw(c760,3845.67) LED11.3@760,3818.43 ; 742.8,3824.34 cw(c719.39,3800.93) LED11.3@752.5,3800.93 ; LED11.3@772.37,3786.05 cw(c802.25,3756.18) 802.25,3798.43 cw(c802.25,3840.67) LED11.3@772.37,3810.8 ; LED10.1@927.63,3786.05 ccw(c897.75,3756.18) 897.75,3798.43 ccw(c897.75,3840.67) LED10.1@927.63,3810.8 ; LED10.1@940,3818.43 ccw(c940,3845.67) 959.27,3826.41 ; LED10.1@947.5,3800.93 cw(c980.61,3800.93) 957.2,3824.34 ; LED10.1@957.5,3800.93 cw(c1014.75,3800.93) 974.27,3841.41 ; 1325.73,3841.41 cw(c1285.25,3800.93) LED9.3@1342.5,3800.93 ; 1340.73,3826.41 ccw(c1360,3845.67) LED9.3@1360,3818.43 ; 1342.8,3824.34 cw(c1319.39,3800.93) LED9.3@1352.5,3800.93 ; LED9.3@1372.37,3786.05 cw(c1402.25,3756.18) 1402.25,3798.43 cw(c1402.25,3840.67) LED9.3@1372.37,3810.8 ; LED8.1@1527.63,3786.05 ccw(c1497.75,3756.18) 1497.75,3798.43 ccw(c1497.75,3840.67) LED8.1@1527.63,3810.8 ; LED8.1@1540,3818.43 ccw(c1540,3845.67) 1559.27,3826.41 ; LED8.1@1547.5,3800.93 cw(c1580.61,3800.93) 1557.2,3824.34 ; LED8.1@1557.5,3800.93 cw(c1614.75,3800.93) 1574.27,3841.41 ; 1925.73,3841.41 cw(c1885.25,3800.93) LED7.3@1942.5,3800.93 ; 1940.73,3826.41 ccw(c1960,3845.67) LED7.3@1960,3818.43 ; 1942.8,3824.34 cw(c1919.39,3800.93) LED7.3@1952.5,3800.93 ; LED7.3@1972.37,3786.05 cw(c2002.25,3756.18) 2002.25,3798.43 cw(c2002.25,3840.67) LED7.3@1972.37,3810.8 ; LED6.1@2127.63,3786.05 ccw(c2097.75,3756.18) 2097.75,3798.43 ccw(c2097.75,3840.67) LED6.1@2127.63,3810.8 ; LED6.1@2140,3818.43 ccw(c2140,3845.67) 2159.27,3826.41 ; LED6.1@2147.5,3800.93 cw(c2180.61,3800.93) 2157.2,3824.34 ; LED6.1@2157.5,3800.93 cw(c2214.75,3800.93) 2174.27,3841.41 ; 2525.73,3841.41 cw(c2485.25,3800.93) LED5.3@2542.5,3800.93 ; 2540.73,3826.41 ccw(c2560,3845.67) LED5.3@2560,3818.43 ; 2542.8,3824.34 cw(c2519.39,3800.93) LED5.3@2552.5,3800.93 ; LED5.3@2572.37,3786.05 cw(c2602.25,3756.18) 2602.25,3798.43 cw(c2602.25,3840.67) LED5.3@2572.37,3810.8 ; LED4.1@2727.63,3786.05 ccw(c2697.75,3756.18) 2697.75,3798.43 ccw(c2697.75,3840.67) LED4.1@2727.63,3810.8 ; LED4.1@2740,3818.43 ccw(c2740,3845.67) 2759.27,3826.41 ; LED4.1@2747.5,3800.93 cw(c2780.61,3800.93) 2757.2,3824.34 ; LED4.1@2757.5,3800.93 cw(c2814.75,3800.93) 2774.27,3841.41 ; 3125.73,3841.41 cw(c3085.25,3800.93) LED3.3@3142.5,3800.93 ; 3140.73,3826.41 ccw(c3160,3845.67) LED3.3@3160,3818.43 ; 3142.8,3824.34 cw(c3119.39,3800.93) LED3.3@3152.5,3800.93 ; LED3.3@3172.37,3786.05 cw(c3202.25,3756.18) 3202.25,3798.43 cw(c3202.25,3840.67) LED3.3@3172.37,3810.8 ; LED2.1@3327.63,3786.05 ccw(c3297.75,3756.18) 3297.75,3798.43 ccw(c3297.75,3840.67) LED2.1@3327.63,3810.8 ; LED2.1@3340,3818.43 ccw(c3340,3845.67) 3359.27,3826.41 ; LED2.1@3347.5,3800.93 cw(c3380.61,3800.93) 3357.2,3824.34 ; LED2.1@3357.5,3800.93 cw(c3414.75,3800.93) 3374.27,3841.41 ; 3725.73,3841.41 cw(c3685.25,3800.93) LED1.3@3742.5,3800.93 ; 3740.73,3826.41 ccw(c3760,3845.67) LED1.3@3760,3818.43 ; 3742.8,3824.34 cw(c3719.39,3800.93) LED1.3@3752.5,3800.93